# Altium PCB Active_LPF_HPF_PCB.PcbDoc
Units mm, origin at the board's own origin, x right, y up, seen from the top; angles counter-clockwise.
Board outline 46 x 38 mm, 2 copper layers (Top Layer, Bottom Layer); 21 components, 18 nets, 68 pads, 0 vias.
Unrouted connection lines stored in the file: 5.
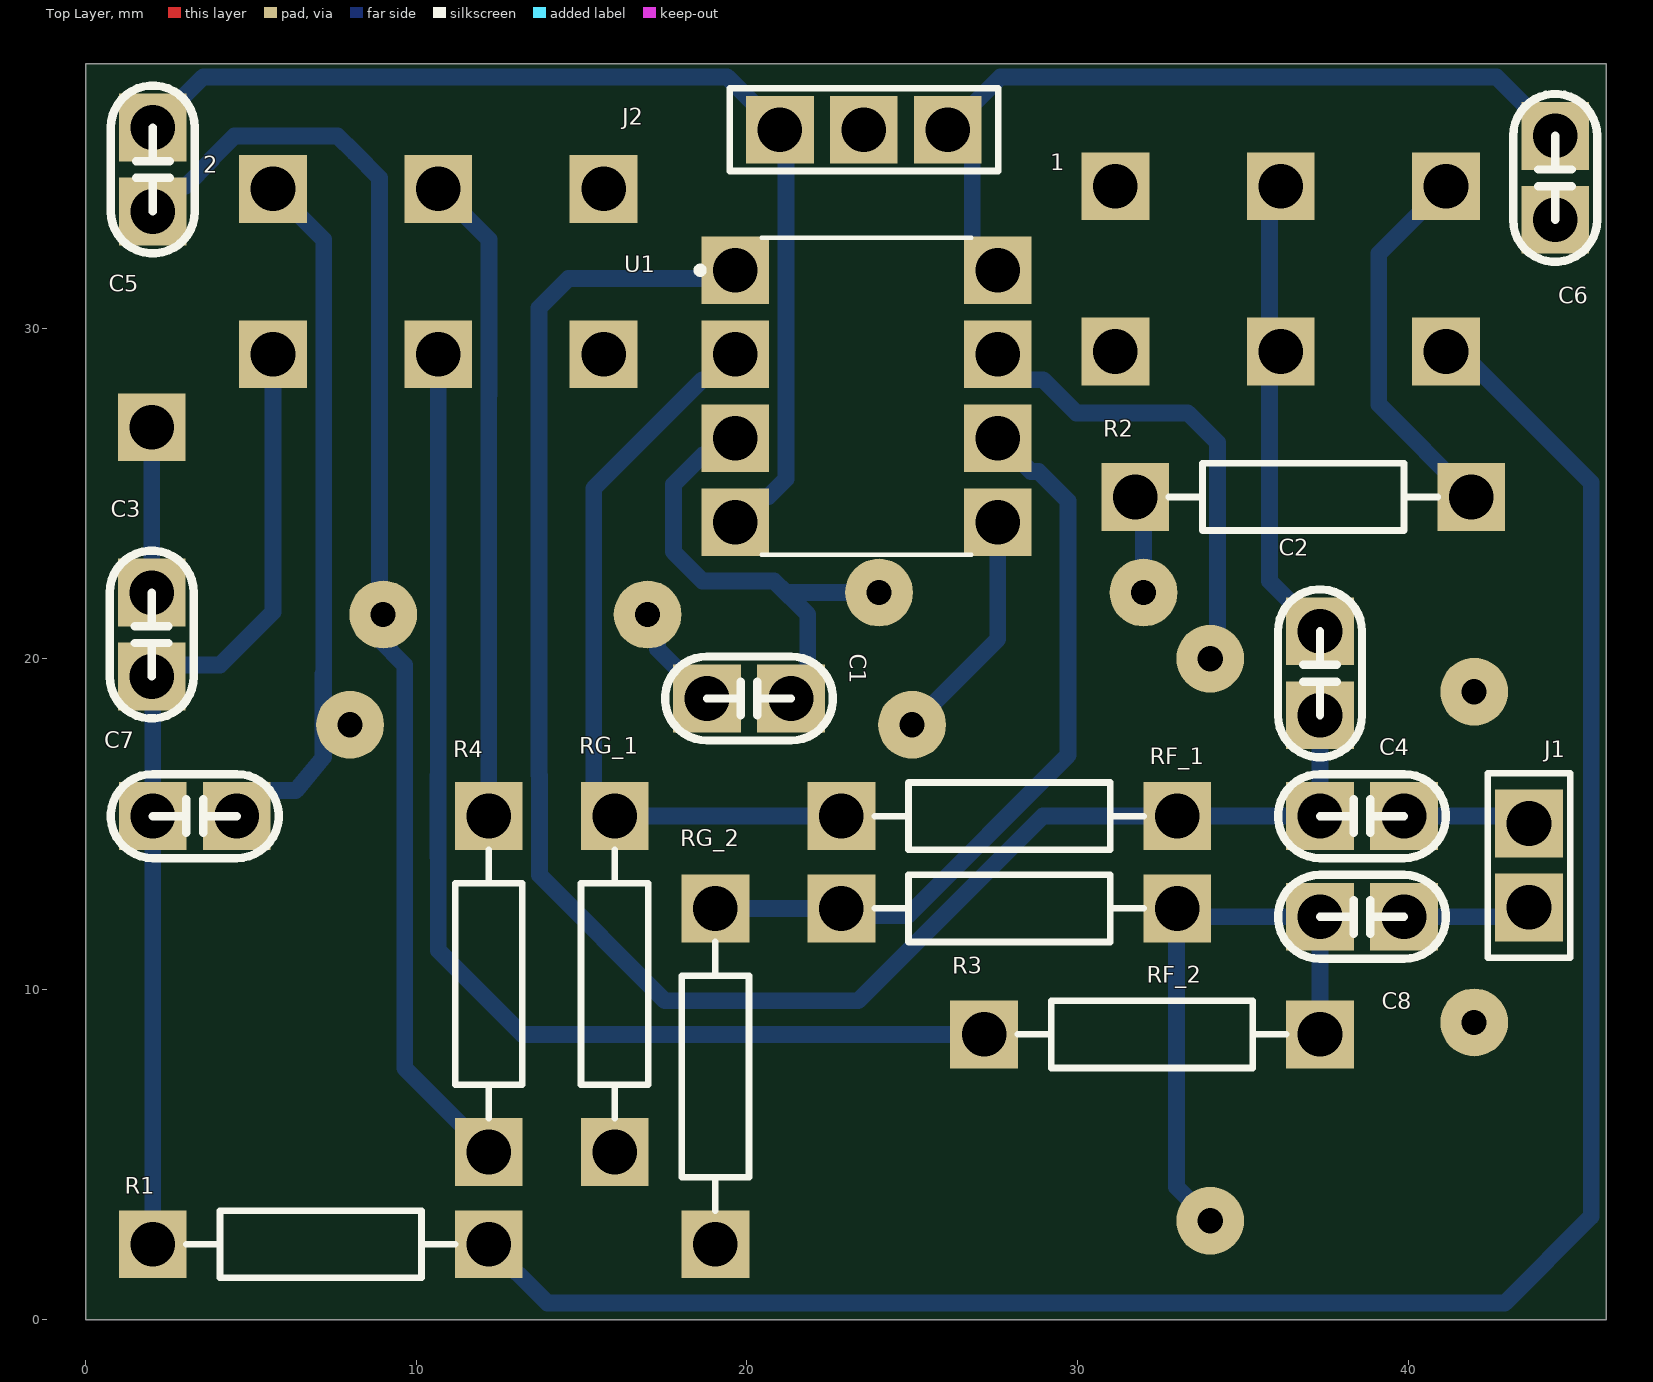
[diagram p0: Top Layer view]
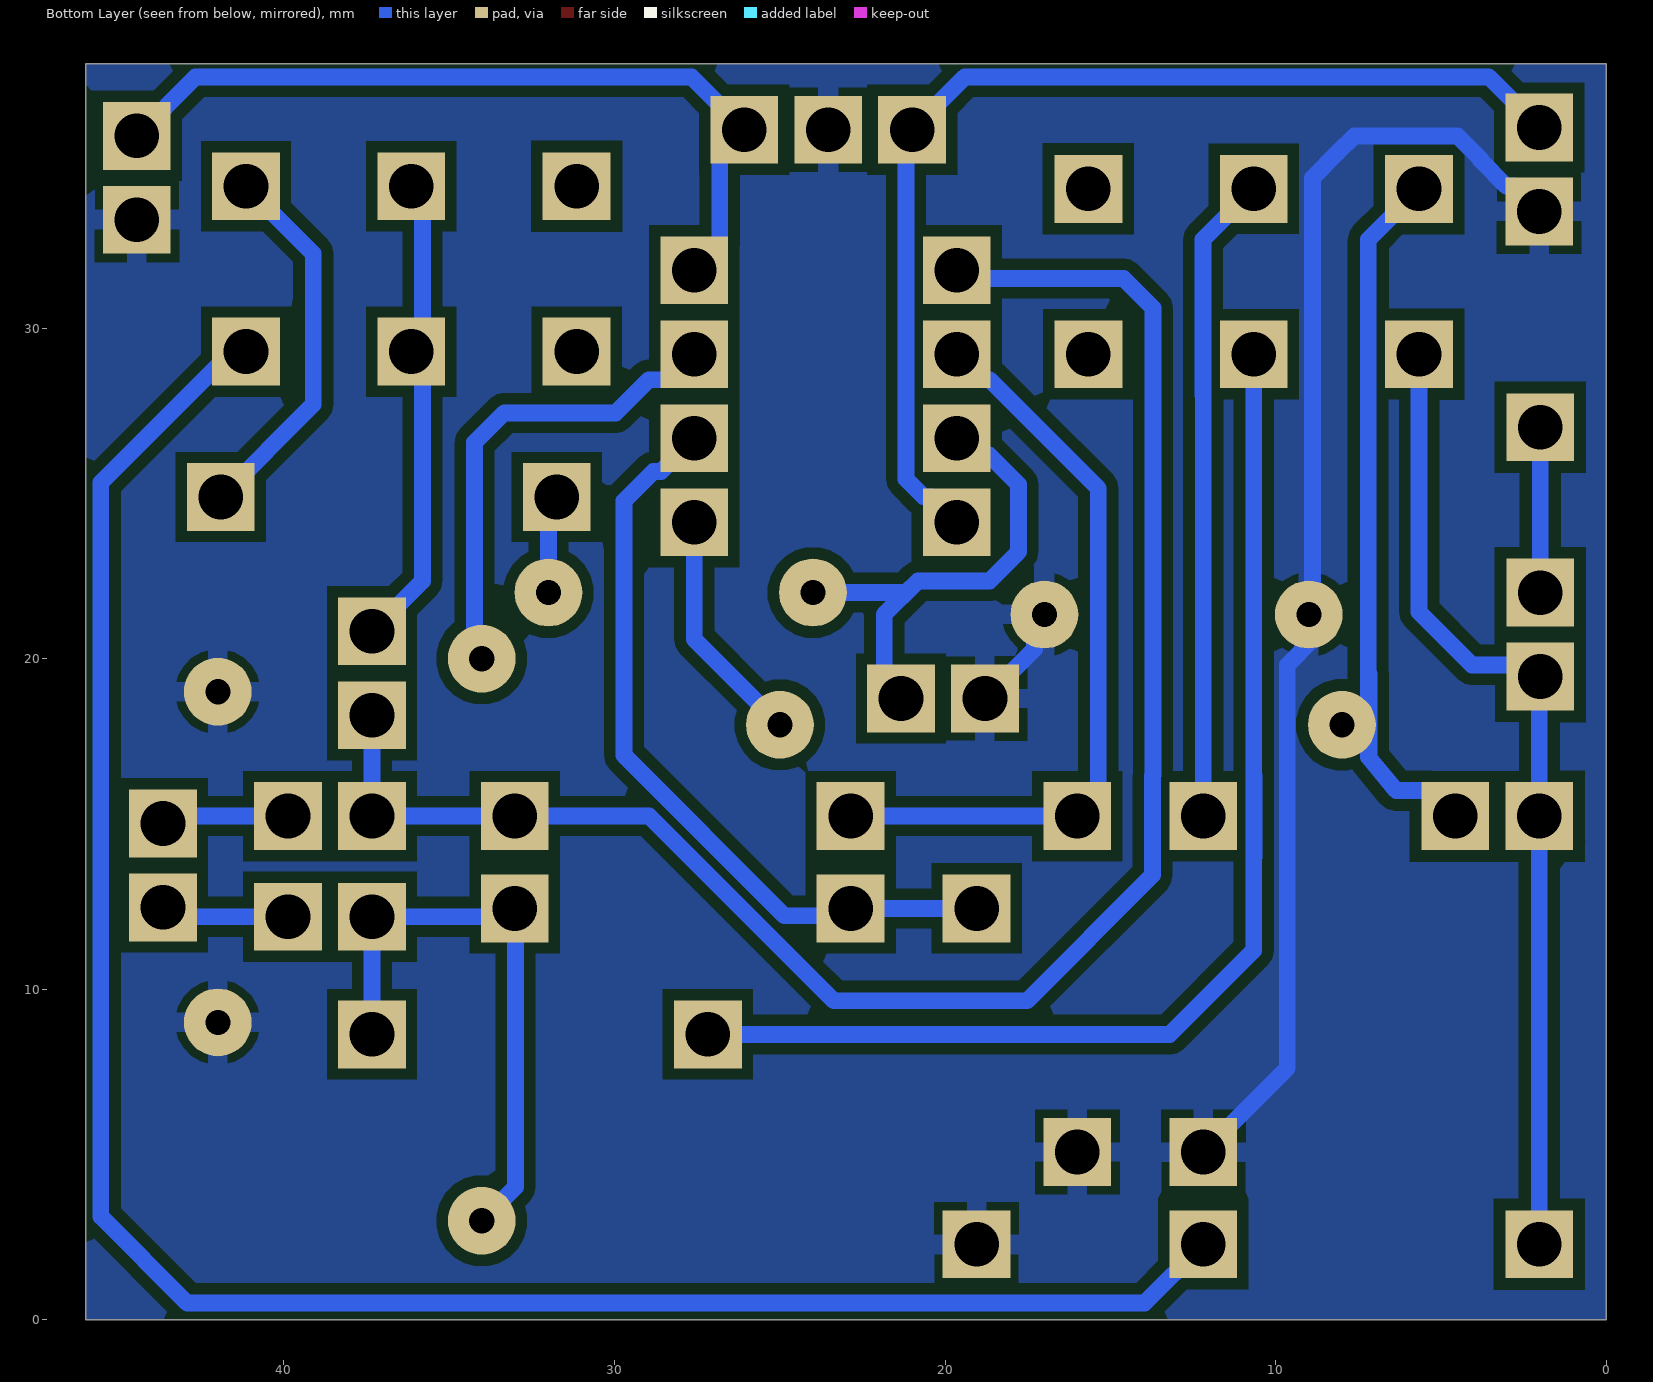
[diagram p1: Bottom Layer view, seen from below]
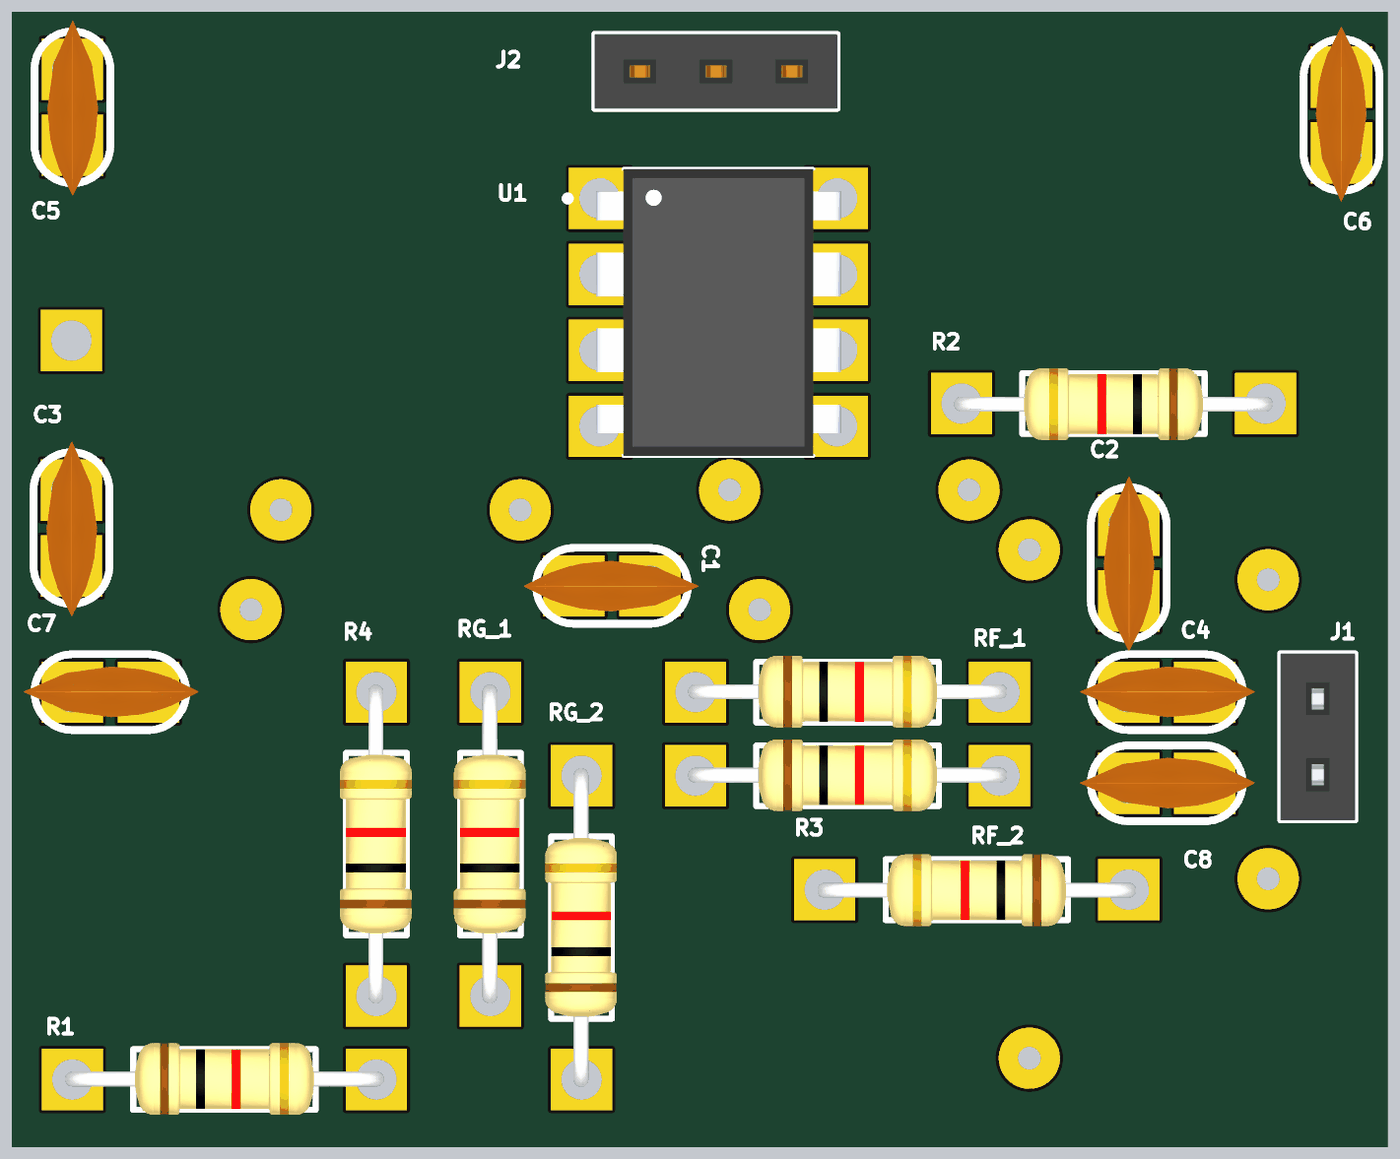
[diagram p2: 3D render of the assembled board from above, using the file's embedded part models]

## Layer stack, top to bottom
Top Solder: solder mask 0.0102, Solder Resist, Dk 3.5
Top Layer: signal copper 0.0356
Dielectric 1: dielectric 0.32, FR-4, Dk 4.8
Bottom Layer: signal copper 0.0356
Bottom Solder: solder mask 0.0102, Solder Resist, Dk 3.5

## Board outline
0,0 46,0 46,38 0,38

## Design rules (kind name [scope] priority, off if disabled: settings)
Clearance [All] p1: gap=0.254 ignorepadtopadclearanceinfootprint=FALSE except(0.35: Arc-Poly Track-Poly SMDPad-Poly THPad-Poly Via-Poly Fill-Poly Poly-Poly Poly-Region Poly-Text Poly-Hole)
PolygonConnect [All] p1: connectstyle=Relief reliefconductorwidth=0.6 reliefentries=4 polygonreliefangle="90 Angle" airgapwidth=0.254
RoutingVias [All] p1: holewidth=0.711 width=1.27 viastyle="Through Hole" minholewidth=0.711 minwidth=1.27 maxholewidth=0.711 maxwidth=1.27
SolderMaskExpansion [All] p1: expansion=0.102 istentingtop=FALSE
SupplyNets "Schematic Supply Nets_10" [InNet('Signal Out 1')] p1: voltage=0.000
SupplyNets "Schematic Supply Nets_9" [InNet('2OUT')] p2: voltage=0.000
SupplyNets "Schematic Supply Nets_8" [InNet('2IN-')] p3: voltage=0.000
SupplyNets "Schematic Supply Nets_7" [InNet('2IN+')] p4: voltage=0.000
SupplyNets "Schematic Supply Nets_6" [InNet('Signal Out 2')] p5: voltage=0.000
SupplyNets "Schematic Supply Nets_5" [InNet('HPF')] p6: voltage=0.000
SupplyNets "Schematic Supply Nets_4" [InNet('GND')] p7: voltage=0.000
SupplyNets "Schematic Supply Nets_3" [InNet('-9V')] p8: voltage=0.000
SupplyNets "Schematic Supply Nets_1" [InNet('VIN')] p9: voltage=0.000
SupplyNets "Schematic Supply Nets" [InNet('+9V')] p10: voltage=0.000
Width [All] p1: maxlimit=1 minlimit=0.254 preferedwidth=0.254 minimp=50.000000 maximp=50.000000 favimp=50.000000
30 further rules are at their usual default settings.

## Components (designator, comment, footprint, x,y, rotation, side; value= is the part's Value field where it differs from the comment)
1 "DualPot" DualPot 506.148,60.29 r180 top
2 "DualPot" DualPot 480.668,60.21 r180 top
C1 "100nF" Cap 20.066,18.796 r180 top
C2 "100nF" Cap 37.338,19.558 r270 top
C3 "1uF" Cap 2,20.73 r270 top
C4 "1uF" Cap 38.608,15.24 r0 top
C5 "100nF" Cap 2.032,34.798 r270 top
C6 "100nF" Cap 44.45,34.544 r90 top
C7 "100nF" Cap 3.302,15.24 r0 top
C8 "1uF" Cap 38.608,12.192 r0 top
J1 "2" HDR_THT_2F_2.54mm 43.659,13.747 r90 top
J2 "3" HDR_THT_3F_2.54mm 23.54,36 r180 top
R1 "1K" Res-(1/4) 6.96,2.311 r0 top
R2 "1K" Res-(1/4) 36.982,24.867 r180 top
R3 "1K" Res-(1/4) 32.41,8.611 r180 top
R4 "1K" Res-(1/4) 12.167,10.008 r90 top
RF_1 "5.6k" Res-(1/4) 27.788,15.265 r0 top
RF_2 "5.6k" Res-(1/4) 27.788,12.471 r0 top
RG_1 "10k" Res-(1/4) 15.977,10.008 r90 top
RG_2 "10k" Res-(1/4) 19.025,7.214 r90 top
U1 "LM358PE3" DIP794W45P254L959H508Q8 23.622,27.94 r0 top

## Footprints (in the part's own frame and the unit in brackets; to place one, negate y for a bottom-side part, rotate by r counter-clockwise, add the part's x,y. Pads: shape width x height; smd on the part's side, far side on the other; paste and mask are expansions set on the pad)
Cap [mm]
  rect 2.05x2.05 hole 1.35: 1(-1.27,0) 2(1.27,0)
  silkscreen extent -2.54,-1.27 2.54,1.27, body extent -2.9,-0.84 2.94,0.86, height 6.42
DIP794W45P254L959H508Q8 [mm]
  rect 2.05x2.05 / inner round 2.05 / far side rect 2.05x2.05 hole 1.35 mask+0.102: 1(-3.97,3.81)
  rect 2.05x2.05 hole 1.35 mask+0.102: 2(-3.97,1.27) 3(-3.97,-1.27) 4(-3.97,-3.81) 5(3.97,-3.81) 6(3.97,-1.27) 7(3.97,1.27) 8(3.97,3.81)
  silkscreen extent -5.13,-4.79 3.17,4.79, body extent -4.1,-4.79 4.1,4.79, height 5.08
DualPot [mm]
  rect 2.05x2.05 hole 1.35: 0(465,26) 1(470,26) 2(475,26) 3(475,31) 4(470,31) 5(465,31)
HDR_THT_2F_2.54mm [mm] "Socket Header, Pitch 2.54 mm, THT, Vertical, single row, 2p"
  rect 2.05x2.05 hole 1.35: 1(-1.27,0) 2(1.27,0)
  silkscreen extent -2.79,-1.25 2.79,1.25, body extent -2.79,-1.25 2.79,1.25, height 8.55
HDR_THT_3F_2.54mm [mm] "Socket Header, Pitch 2.54 mm, THT, Vertical, single row, 3p"
  rect 2.05x2.05 hole 1.35: 1(-2.54,0) 2(0,0) 3(2.54,0)
  silkscreen extent -4.06,-1.25 4.06,1.25, body extent -4.06,-1.25 4.06,1.25, height 8.55
Res-(1/4) [mm]
  rect 2.05x2.05 hole 1.35: 1(-4.928,-0.025) 2(5.232,-0.025)
  silkscreen extent -3.91,-1.04 4.22,0.99, body extent -5.17,-1.21 5.49,1.19, height 2.39

## Part data
C1 C2 C3 C4 C5 C6 C7 C8: library part Cap_Multi_THT, "Multi layer capacitor", Package=Package?, Rating=Rating?, Type=Type?, Validation=Valid, Inflow=inflow?
J1: library part Con_FPH_2x1_V_THT_2.54, "Header, single row, 2 pin", Package=Package?, Rating=Rating?, Type=Type?, Validation=NT, Inflow=8101
J2: library part Con_FPH_3x1_V_THT_2.54, "Header, single row, 3 pin", Package=Package?, Rating=Rating?, Type=Type?, Validation=NT, Inflow=8101
R1 R2 R3 R4 RF_1 RF_2 RG_1 RG_2: library part Res_THT, "Resistor", Package=Dip, Rating=0.25W, Type=10%, Validation=Valid, Inflow=inflow?
U1: "Dual, 30-V, 700-kHz operational amplifier", Package="PDIP-8 Texas", Check_prices=https://www.snapeda.com/parts/LM358PE3/Texas+Instruments/view-part/?ref=eda, MF="Texas Instruments", MP=LM358PE3, SnapEDA_Link=https://www.snapeda.com/parts/LM358PE3/Texas+Instruments/view-part/?ref=snap

## Free pads (board coordinates)
  rect 2.05x2.05 hole 1.35: 0(2,27)
  round 2.05 hole 0.762: J1(8,18) J1(25,18) J2(34.016,3) J2(34.016,20) J3(9,21.336) J3(17,21.336) J4(24,22) J4(32,22) J5(42,9) J5(42,19)

## Nets (pads, with @x,y where several pads share a name; then routed paths per layer and width w, separated by ;. In a path a pad name is that pad's centre, name@x,y a point inside that pad or via, vN(x,y) a via of type N, cw(c..) or ccw(c..) an arc to the next point about the centre after c; other vN are vias at no path point)
2IN+: 2.2 C7.2 pad.J1 U1.5 | length 31.4
  Bottom Layer w0.508: C7.2 5.343,16.011 6.359,16.011 7.18,17.006 ; 2.2 7.201,32.677 7.201,19.558 ; 7.201,19.216 7.201,19.558 ; pad.J1@25,18 27.592,20.592 U1.5 ; 7.18,17.006 7.201,17.027 7.201,19.558 ; 7.18,17.006 7.18,19.537 7.201,19.558
2IN-: RF_2.1 RG_2.2 U1.6 | length 23.4
  Bottom Layer w0.508: RG_2.2 RF_2.1 23.083,12.223 24.861,12.223 29.718,17.08 29.718,24.772 28.827,25.663 28.599,25.663 U1.6
2OUT: C8.1 pad.J2 R3.1 RF_2.2 U1.7 | length 32.2
  Bottom Layer w0.508: U1.7 28.363,28.439 28.965,28.439 29.972,27.432 33.34,27.432 34.233,26.539 34.233,20.217 pad.J2@34.016,20 ; pad.J2@34.016,3 33,4.016 33,12.426 RF_2.2 33.274,12.192 C8.1 R3.1
+9V: C6.2 J2.1 U1.8 | length 24.6
  Bottom Layer w0.508: U1.8 26.821,32.521 26.821,35.259 J2.1 27.672,37.592 42.672,37.592 C6.2
-9V: C5.1 J2.3 U1.4 | length 33
  Bottom Layer w0.508: C5.1 3.556,37.592 19.408,37.592 J2.3 21.185,35.815 21.185,25.435 20.651,24.901 20.423,24.901 U1.4
GND: C1.2 C5.2 C6.1 J2.2 pad.J3 pad.J5 R4.1 RG_1.1 RG_2.1 | length 42.5
  Bottom Layer w0.508: C5.2 2.803,34.299 3.031,34.299 3.81,35.078 3.81,35.12 4.504,35.814 7.62,35.814 8.127,35.307 8.89,34.544 8.89,20.574 9.652,19.812 9.652,7.62 R4.1 ; pad.J3@17,21.336 17.295,21.041 17.295,20.297 C1.2
HPF: 2.3 C3.2 C7.1 R1.1 | length 30.5
  Bottom Layer w0.508: C7.1@1.261,14.469 C7.1 ; R1.1 C7.1 ; 2.3 5.668,21.416 4.064,19.812 2.352,19.812 C3.2 2.032,19.428 C7.1
Net1_0: 1.0 R2.1 | length 11.4
  Bottom Layer w0.508: 1.0 39.116,32.258 39.116,27.686 R2.1
Net1_5: 1.5 R1.2 | length 63
  Bottom Layer w0.508: R1.2 13.97,0.508 42.926,0.508 45.539,3.121 45.539,25.327 1.5@41.576,29.29
Net2_1: 2.1 R4.2 | length 19.6
  Bottom Layer w0.508: 2.1 12.201,32.677 12.201,27.975 12.192,27.966 R4.2
Net2_4: 2.4 R3.2 | length 35.6
  Bottom Layer w0.508: 2.4 10.668,16.484 10.659,16.475 10.659,14.005 10.668,13.996 10.668,11.176 13.208,8.636 R3.2
NetC1_1: C1.1 pad.J4 R2.2 U1.3 | length 18.4
  Bottom Layer w0.508: U1.3 19.144,26.162 18.673,26.162 17.78,25.269 17.78,23.234 18.662,22.352 20.828,22.352 ; C1.1 21.844,19.304 21.844,21.336 20.828,22.352 ; pad.J4@24,22 21.18,22 20.828,22.352 ; R2.2 32,24.642 pad.J4@32,22
NetC2_2: C2.2 C4.1 RF_1.2 U1.1 | length 54.1
  Bottom Layer w0.508: U1.1 19.398,31.496 14.609,31.496 13.716,30.603 13.716,16.484 13.725,16.475 13.725,13.453 17.526,9.652 23.368,9.652 28.956,15.24 RF_1.2 C4.1 C2.2
NetRF_1_1: RF_1.1 RG_1.2 U1.2 | length 23
  Bottom Layer w0.508: U1.2 18.881,28.439 18.653,28.439 15.367,25.153 15.367,15.875 RG_1.2 RF_1.1
POTLEG: 1.1 1.4 C2.1 | length 14.8
  Bottom Layer w0.508: 1.4 35.814,29.624 35.814,33.956 1.1 ; 1.4@36.322,29.464 35.814,28.956 35.814,22.352 C2.1
"Signal Out 1": C4.2 J1.2 | length 3.9
  Bottom Layer w0.508: C4.2 43.436,15.24 J1.2
"Signal Out 2": C8.2 J1.1 | length 3.9
  Bottom Layer w0.508: C8.2 43.374,12.192 J1.1
VIN: C3.1 pad.0 | length 5
  Bottom Layer w0.508: C3.1 pad.0
pads on no net: 1.2 1.3 2.0 2.5

## Polygon pours and split planes (outlines as drawn)
GND on Bottom Layer "NONET_L-01_P-001" (solid, pour order 0): 0,37.998 0,0 45.999,0 45.999,37.998